# EAGLE board business_card_v1 (EAGLE 9.5.2)
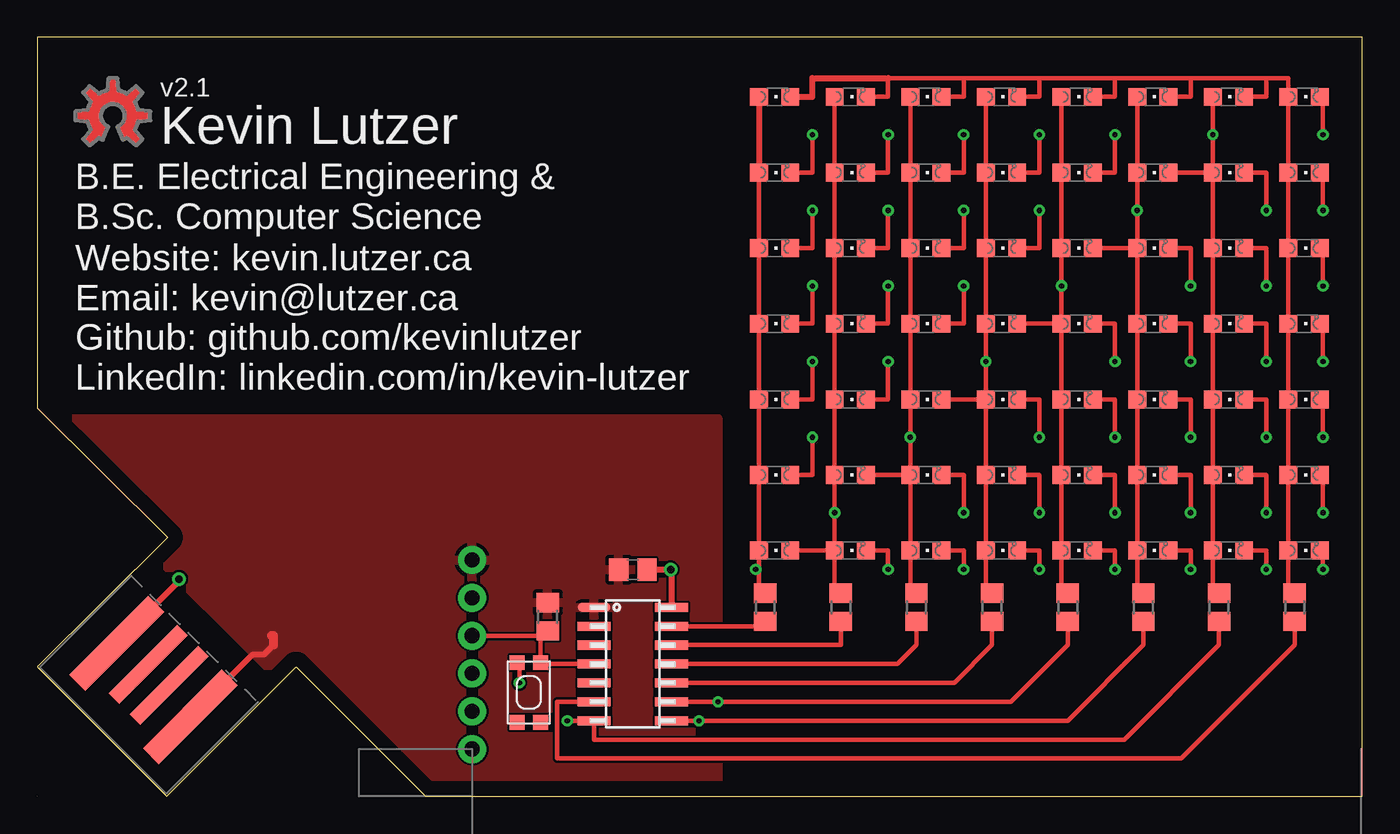
[diagram p0: board, top side]
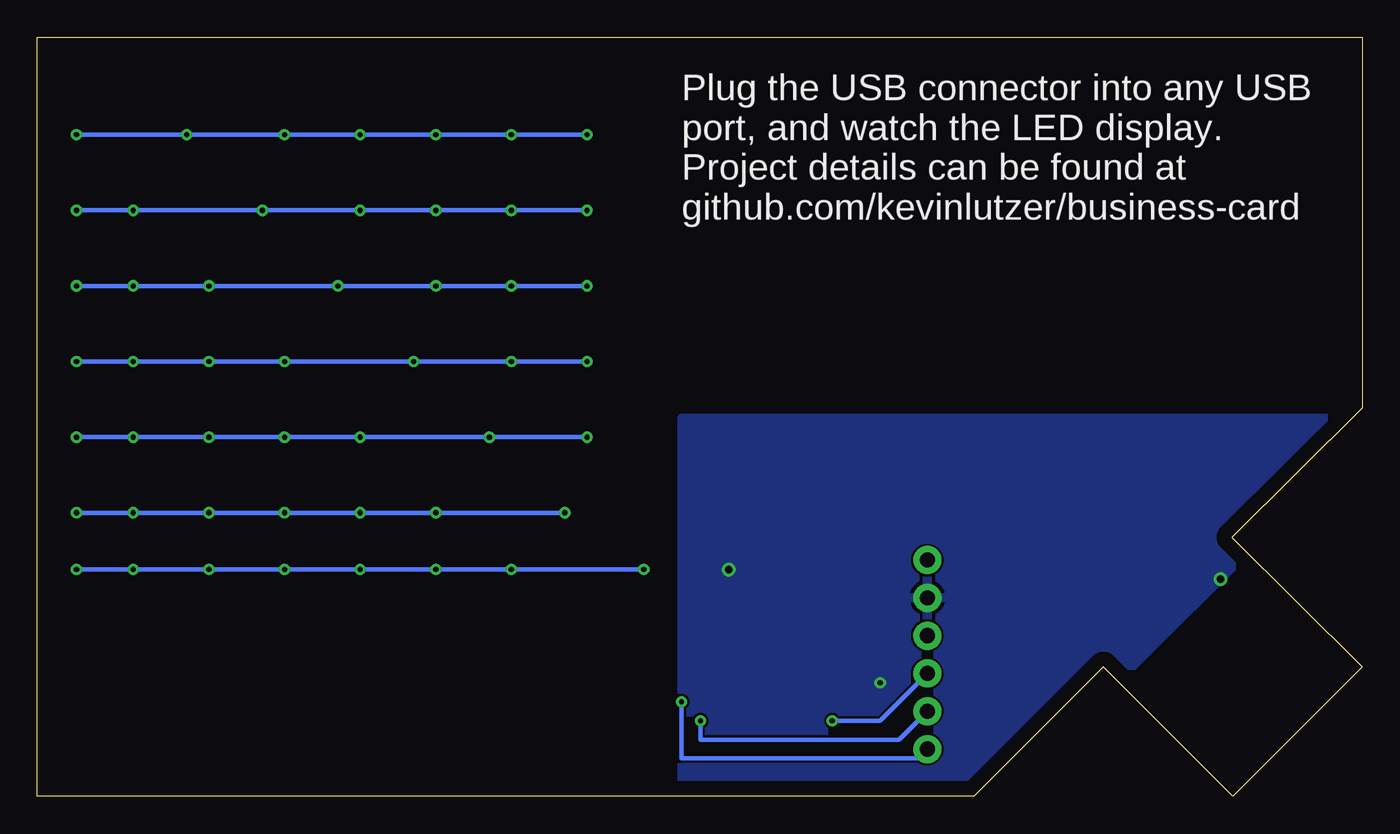
[diagram p1: board, bottom side, seen from below]

Size 89 x 51 mm. Coordinates in mm from the lower left corner, seen from the top.
Outline: 0,51 0,26.09 8.77,17.39 0,8.7 8.7,0 17.39,8.7 26.09,0 89,0 89,51 0,51
Copper layers (1*16): Top 0.035mm / dielectric 1.5mm / Bottom 0.035mm
Design rules "default": minimum track width 6mil, minimum drill 0.35mm, track to track 6mil, track to pad 6mil, pad to pad 6mil, via to via 6mil, smd to smd 6mil, copper to edge 40mil, drill to drill 6mil, minimum pad ring 10mil, minimum via ring 8mil, stop-mask expansion 4mil, vias tented up to drill 0mil, thermal gap 10mil

## Footprints (pad centres in the part's own frame; a part is rotated, then mirrored left to right if it is on the bottom)
C0805 = smd 1.3 x 1.5: 1 -0.95,0; 2 0.95,0
SOIC14 = smd 0.61 x 2.21: 1 -3.81,-2.603; 2 -2.54,-2.603; 3 -1.27,-2.603; 4 0,-2.603; 5 1.27,-2.603; 6 2.54,-2.603; 7 3.81,-2.603; 8 3.81,2.603; 9 2.54,2.603; 10 1.27,2.603; 11 0,2.603; 12 -1.27,2.603; 13 -2.54,2.603; 14 -3.81,2.603
USB-A-PCB = smd 7.5 x 1.5: 5V -0.2,-3.5; GND -0.2,3.5 | smd 6.5 x 1: USB_M 0.3,-1; USB_P 0.3,1
CHIPLED_0805 = smd 1.2 x 1.2: A 0,-1.05; C 0,1.05
R0805 = smd 1.3 x 1.5: 1 -0.95,0; 2 0.95,0
KMR2 = smd 1 x 1: 1 2,0.8; 2 2,-0.8; 3 -2,0.8; 4 -2,-0.8
1X01_NO_SILK = drill 1.016 pad 1.88: 1 0,0

## Placement (x,y rotation side)
C1  0.1uF  [C0805]  40.01,15.24 0 top
IC1  [SOIC14]  40.01,8.89 270 top
JP1  USBPCB  [USB-A-PCB]  7.95,7.95 45 top
LED1  [CHIPLED_0805]  49.53,46.99 270 top
LED2  [CHIPLED_0805]  54.61,46.99 270 top
LED3  [CHIPLED_0805]  59.69,46.99 270 top
LED4  [CHIPLED_0805]  64.77,46.99 270 top
LED5  [CHIPLED_0805]  69.85,46.99 270 top
LED6  [CHIPLED_0805]  74.93,46.99 270 top
LED7  [CHIPLED_0805]  80.01,46.99 270 top
LED8  [CHIPLED_0805]  85.09,46.99 270 top
LED9  [CHIPLED_0805]  49.53,41.91 270 top
LED10  [CHIPLED_0805]  54.61,41.91 270 top
LED11  [CHIPLED_0805]  59.69,41.91 270 top
LED12  [CHIPLED_0805]  64.77,41.91 270 top
LED13  [CHIPLED_0805]  69.85,41.91 270 top
LED14  [CHIPLED_0805]  74.93,41.91 270 top
LED15  [CHIPLED_0805]  80.01,41.91 270 top
LED16  [CHIPLED_0805]  85.09,41.91 270 top
LED17  [CHIPLED_0805]  49.53,36.83 270 top
LED18  [CHIPLED_0805]  54.61,36.83 270 top
LED19  [CHIPLED_0805]  59.69,36.83 270 top
LED20  [CHIPLED_0805]  64.77,36.83 270 top
LED21  [CHIPLED_0805]  69.85,36.83 270 top
LED22  [CHIPLED_0805]  74.93,36.83 270 top
LED23  [CHIPLED_0805]  80.01,36.83 270 top
LED24  [CHIPLED_0805]  85.09,36.83 270 top
LED25  [CHIPLED_0805]  49.53,31.75 270 top
LED26  [CHIPLED_0805]  54.61,31.75 270 top
LED27  [CHIPLED_0805]  59.69,31.75 270 top
LED28  [CHIPLED_0805]  64.77,31.75 270 top
LED29  [CHIPLED_0805]  69.85,31.75 270 top
LED30  [CHIPLED_0805]  74.93,31.75 270 top
LED31  [CHIPLED_0805]  80.01,31.75 270 top
LED32  [CHIPLED_0805]  85.09,31.75 270 top
LED33  [CHIPLED_0805]  49.53,26.67 270 top
LED34  [CHIPLED_0805]  54.61,26.67 270 top
LED35  [CHIPLED_0805]  59.69,26.67 270 top
LED36  [CHIPLED_0805]  64.77,26.67 270 top
LED37  [CHIPLED_0805]  69.85,26.67 270 top
LED38  [CHIPLED_0805]  74.93,26.67 270 top
LED39  [CHIPLED_0805]  80.01,26.67 270 top
LED40  [CHIPLED_0805]  85.09,26.67 270 top
LED41  [CHIPLED_0805]  49.53,21.59 270 top
LED42  [CHIPLED_0805]  54.61,21.59 270 top
LED43  [CHIPLED_0805]  59.69,21.59 270 top
LED44  [CHIPLED_0805]  64.77,21.59 270 top
LED45  [CHIPLED_0805]  69.85,21.59 270 top
LED46  [CHIPLED_0805]  74.93,21.59 270 top
LED47  [CHIPLED_0805]  80.01,21.59 270 top
LED48  [CHIPLED_0805]  85.09,21.59 270 top
LED49  [CHIPLED_0805]  49.53,16.51 270 top
LED50  [CHIPLED_0805]  54.61,16.51 270 top
LED51  [CHIPLED_0805]  59.69,16.51 270 top
LED52  [CHIPLED_0805]  64.77,16.51 270 top
LED53  [CHIPLED_0805]  69.85,16.51 270 top
LED54  [CHIPLED_0805]  74.93,16.51 270 top
LED55  [CHIPLED_0805]  80.01,16.51 270 top
LED56  [CHIPLED_0805]  85.09,16.51 270 top
R1  10K  [R0805]  34.29,12.06 90 top
R2  150  [R0805]  48.9,12.7 90 top
R3  150  [R0805]  53.98,12.7 90 top
R4  150  [R0805]  59.05,12.7 90 top
R5  150  [R0805]  64.14,12.7 90 top
R6  150  [R0805]  69.22,12.7 90 top
R7  150  [R0805]  74.3,12.7 90 top
R8  150  [R0805]  79.38,12.7 90 top
R9  150  [R0805]  84.45,12.7 90 top
SW1  SPST_TACT-KMR2  [KMR2]  33.02,6.99 270 top
TP1  TEST-POINTPOGO_PTH  [1X01_NO_SILK]  29.21,10.79 0 top
TP2  TEST-POINTPOGO_PTH  [1X01_NO_SILK]  29.21,5.71 0 top
TP3  TEST-POINTPOGO_PTH  [1X01_NO_SILK]  29.21,15.88 0 top
TP4  TEST-POINTPOGO_PTH  [1X01_NO_SILK]  29.21,8.26 0 top
TP5  TEST-POINTPOGO_PTH  [1X01_NO_SILK]  29.21,13.34 0 top
TP6  TEST-POINTPOGO_PTH  [1X01_NO_SILK]  29.21,3.17 0 top
U$1  [OSHWLOGO_TOP_0.2]  5.08,45.72 0 top
U$2  [OSHWLOGO_TOL_0.2]  5.08,45.72 0 top
U$3  [OSHWLOGO_TOL_0.2]  5.08,45.72 0 top

## Library data of the parts
C1 = rcl; SPICEPREFIX: C
IC1 = atmel_tiny24-44-84tiny48-88mega48-88-168-328
JP1 TP1-TP6 = SparkFun-Connectors
LED1-LED16 LED18-LED56 = led
LED17 = led; SPICEPREFIX: L
R1-R9 = rcl; SPICEPREFIX: R
SW1 U$1-U$3 = adafruit

## Nets
GND: C1.2 IC1.14 JP1.GND SW1.4 TP5.1
MISO: IC1.8 R7.1 TP2.1
MOSI: IC1.7 R8.1 TP4.1
N$1: LED1.A LED9.A LED17.A LED25.A LED33.A LED41.A LED49.A LED50.C LED51.C LED52.C LED53.C LED54.C LED55.C LED56.C R2.2
N$2: LED2.A LED10.A LED18.A LED26.A LED34.A LED42.A LED43.C LED44.C LED45.C LED46.C LED47.C LED48.C LED49.C LED50.A R3.2
N$3: LED3.A LED11.A LED19.A LED27.A LED35.A LED36.C LED37.C LED38.C LED39.C LED40.C LED41.C LED42.C LED43.A LED51.A R4.2
N$4: LED4.A LED12.A LED20.A LED28.A LED29.C LED30.C LED31.C LED32.C LED33.C LED34.C LED35.C LED36.A LED44.A LED52.A R5.2
N$8: LED1.C LED2.C LED3.C LED4.C LED5.C LED6.C LED7.C LED8.A LED16.A LED24.A LED32.A LED40.A LED48.A LED56.A R9.2
N$15: LED7.A LED8.C LED9.C LED10.C LED11.C LED12.C LED13.C LED14.C LED15.A LED23.A LED31.A LED39.A LED47.A LED55.A R8.2
N$31: LED6.A LED14.A LED15.C LED16.C LED17.C LED18.C LED19.C LED20.C LED21.C LED22.A LED30.A LED38.A LED46.A LED54.A R7.2
N$34: LED5.A LED13.A LED21.A LED22.C LED23.C LED24.C LED25.C LED26.C LED27.C LED28.C LED29.A LED37.A LED45.A LED53.A R6.2
PIN0: IC1.13 R2.1
PIN1: IC1.12 R3.1
PIN2: IC1.11 R4.1
PIN3: IC1.10 R5.1
PIN7: IC1.6 R9.1
RESET: IC1.4 R1.1 SW1.3 TP1.1
SCK: IC1.9 R6.1 TP6.1
UCC: C1.1 IC1.1 JP1.5V R1.2 TP3.1

## Tracks (layer width: path | path; a pad name or v marks a point on that pad's centre or on a via)
GND  (via drill 0.35, 0.5)
  Top 0.305: IC1.14 42.55,12.7 | SW1.4 32.38,8.82 v32.38,7.62
  Top 0.406: JP1.GND 9.53,14.47 v9.53,14.61 | C1.2 v42.55,15.24 42.61,15.18 IC1.14
  pour Bottom: -1.27,25.4 45.72,25.4 45.72,0 24.13,0
MISO  (via drill 0.35)
  Top 0.305: R7.1 74.3,10.16 69.22,5.08 v44.45,5.08 IC1.8
  Bottom 0.305: TP2.1 31.11,3.81 44.45,3.81 v44.45,5.08
MOSI  (via drill 0.35)
  Top 0.305: R8.1 79.38,10.16 73.03,3.81 37.4,3.81 IC1.7 | v35.61,5.08 IC1.7 | IC1.7 37.47,5.02
  Bottom 0.305: TP4.1 32.38,5.08 v35.61,5.08
N$1  (via drill 0.35)
  Top 0.305: LED41.A LED49.A 48.48,15.24 | LED41.A LED25.A | 48.48,15.24 v48.26,15.24 | LED50.C 57.15,16.51 v57.15,15.24 | LED51.C 62.23,16.51 v62.23,15.24 | LED52.C 67.31,16.51 v67.31,15.24 | LED53.C 72.39,16.51 v72.39,15.24 | LED54.C 77.47,16.51 v77.47,15.24 | LED55.C 82.55,16.51 v82.55,15.24 | R2.2 48.48,13.55 48.48,15.24 | LED33.A LED41.A | LED17.A LED25.A | LED25.A LED9.A | LED56.C 86.36,16.29 v86.36,15.24
  Top 0.406: LED1.A LED9.A
  Bottom 0.305: v86.36,15.24 v82.55,15.24 v77.47,15.24 v72.39,15.24 v67.31,15.24 v62.23,15.24 v57.15,15.24 v48.26,15.24
N$2  (via drill 0.35)
  Top 0.305: LED50.A v53.56,19.05 LED42.A LED26.A | v86.36,19.05 86.36,21.59 LED48.C | LED49.C LED50.A | LED43.C 62.23,21.59 v62.23,19.05 | LED44.C 67.31,21.59 v67.31,19.05 | LED45.C 72.39,21.59 v72.39,19.05 | LED46.C 77.47,21.59 v77.47,19.05 | LED47.C 82.55,21.59 v82.55,19.05 | LED50.A 53.56,13.55 R3.2 | LED2.A LED10.A LED18.A LED26.A | LED34.A LED26.A
  Bottom 0.305: v53.56,19.05 v62.23,19.05 v67.31,19.05 v72.39,19.05 v77.47,19.05 v82.55,19.05 v86.36,19.05
N$3  (via drill 0.35)
  Top 0.305: LED43.A LED51.A 58.64,13.55 R4.2 | LED35.A v58.64,24.13 LED43.A | LED35.A LED19.A | LED19.A LED3.A | LED41.C 52.07,21.59 v52.07,24.13 | v86.36,24.13 86.36,26.67 LED40.C | LED36.C 67.31,26.67 v67.31,24.13 | LED37.C 72.39,26.67 v72.39,24.13 | LED38.C 77.47,26.67 v77.47,24.13 | LED39.C 82.55,26.67 v82.55,24.13 | LED42.C LED43.A | LED11.A LED19.A | LED35.A LED43.A | LED27.A LED35.A
  Bottom 0.305: v52.07,24.13 v58.64,24.13 v67.31,24.13 v72.39,24.13 v77.47,24.13 v82.55,24.13 v86.36,24.13
N$4  (via drill 0.35)
  Top 0.305: LED4.A LED20.A | LED20.A v63.72,29.21 LED36.A | LED36.A LED52.A | LED33.C 52.07,26.67 v52.07,29.21 | v86.36,29.21 86.36,31.75 LED32.C | LED31.C 82.55,31.75 v82.55,29.21 | LED30.C 77.47,31.75 v77.47,29.21 | LED29.C 72.39,31.75 v72.39,29.21 | LED52.A 63.72,13.55 R5.2 | LED34.C 57.15,26.67 v57.15,29.21 | LED35.C LED36.A | LED28.A LED36.A | LED12.A LED20.A | LED44.A LED52.A
  Bottom 0.305: v52.07,29.21 v57.15,29.21 v63.72,29.21 v72.39,29.21 v77.47,29.21 v82.55,29.21 v86.36,29.21
N$8
  Top 0.305: LED56.A LED40.A LED32.A LED24.A LED16.A LED8.A 84.04,48.26 82.55,48.26 | 82.55,48.26 77.47,48.26 | 77.47,48.26 72.39,48.26 | 72.39,48.26 67.31,48.26 | 67.31,48.26 62.23,48.26 | 62.23,48.26 57.15,48.26 57.15,46.99 LED2.C | LED3.C 62.23,46.99 62.23,48.26 | LED4.C 67.31,46.99 67.31,48.26 | LED5.C 72.39,46.99 72.39,48.26 | LED6.C 77.47,46.99 77.47,48.26 | LED7.C 82.55,46.99 82.55,48.26 | LED56.A 84.04,13.55 R9.2 | LED48.A LED56.A
  Top 0.406: LED1.C 52.07,46.99 52.07,48.26 57.15,48.26
N$15  (via drill 0.35)
  Top 0.305: LED31.A LED15.A | LED7.A v78.96,44.45 LED15.A | LED9.C 52.07,41.91 v52.07,44.45 | v86.36,44.45 86.36,46.99 LED8.C | LED10.C 57.15,41.91 v57.15,44.45 | LED11.C 62.23,41.91 v62.23,44.45 | LED12.C 67.31,41.91 v67.31,44.45 | LED13.C 72.39,41.91 v72.39,44.45 | LED14.C LED15.A | R8.2 78.96,13.55 LED55.A LED47.A LED39.A LED31.A | LED23.A LED31.A
  Bottom 0.305: v52.07,44.45 v57.15,44.45 v62.23,44.45 v67.31,44.45 v72.39,44.45 v78.96,44.45 v86.36,44.45
N$31  (via drill 0.35)
  Top 0.305: LED54.A LED38.A LED30.A LED22.A | LED17.C 52.07,36.83 v52.07,39.37 | v86.36,39.37 86.36,41.91 LED16.C | LED15.C 82.55,41.91 v82.55,39.37 | LED18.C 57.15,36.83 v57.15,39.37 | LED19.C 62.23,36.83 v62.23,39.37 | LED20.C 67.31,36.83 v67.31,39.37 | LED21.C LED22.A | LED54.A 73.88,13.55 R7.2 | LED6.A v73.88,39.37 LED22.A | LED14.A LED22.A | LED46.A LED54.A
  Bottom 0.305: v52.07,39.37 v57.15,39.37 v62.23,39.37 v67.31,39.37 v73.88,39.37 v82.55,39.37 v86.36,39.37
N$34  (via drill 0.35)
  Top 0.305: LED53.A LED37.A LED29.A | LED21.A v68.8,34.29 LED29.A | LED21.A LED5.A | LED25.C 52.07,31.75 v52.07,34.29 | v86.36,34.29 86.36,36.83 LED24.C | LED23.C 82.55,36.83 v82.55,34.29 | LED22.C 77.47,36.83 v77.47,34.29 | LED53.A 68.8,13.55 R6.2 | LED27.C 62.23,31.75 v62.23,34.29 | LED28.C LED29.A | LED26.C 57.15,31.75 v57.15,34.29 | LED21.A LED29.A | LED45.A LED53.A | LED13.A LED21.A
  Bottom 0.305: v52.07,34.29 v57.15,34.29 v62.23,34.29 v68.8,34.29 v77.47,34.29 v82.55,34.29 v86.36,34.29
PIN0
  Top 0.305: IC1.13 48.9,11.43 R2.1
PIN1
  Top 0.305: IC1.12 53.98,10.16 R3.1
PIN2
  Top 0.305: IC1.11 57.78,8.89 59.05,10.16 R4.1
PIN3
  Top 0.305: IC1.10 61.59,7.62 64.14,10.16 R5.1
PIN7
  Top 0.305: IC1.6 34.92,6.35 34.92,2.54 76.83,2.54 84.45,10.16 R9.1
RESET
  Top 0.305: IC1.4 33.91,8.89 SW1.3 33.82,10.64 R1.1 33.97,10.79 TP1.1
SCK  (via drill 0.35)
  Top 0.305: R6.1 69.22,10.16 65.41,6.35 v45.72,6.35 IC1.9
  Bottom 0.305: v45.72,6.35 45.72,2.54 29.84,2.54 TP6.1
UCC
  Top 0.406: JP1.5V 14.47,9.53 15.24,9.53 15.88,10.16
  Top 0.61: 15.74,10.79 15.88,10.79 15.88,10.16
  pour Top: -1.27,25.4 45.72,25.4 45.72,0 24.13,0

## Text on the board
tNames: v2.1 | Kevin Lutzer | B.E. Electrical Engineering & / B.Sc. Computer Science | Website: kevin.lutzer.ca / Email: kevin@lutzer.ca / Github: github.com/kevinlutzer / LinkedIn: linkedin.com/in/kevin-lutzer
bNames: Plug the USB connector into any USB / port, and watch the LED display. / Project details can be found at / github.com/kevinlutzer/business-card